# Altium PCB nfc-epd.PcbDoc
Units mil, origin at the board's own origin, x right, y up, seen from the top; angles counter-clockwise.
Board outline 4000 x 2000 mil, 4 copper layers (Top Layer, GND Plane, Signal 1, Bottom Layer); 111 components, 92 nets, 355 pads, 73 vias.
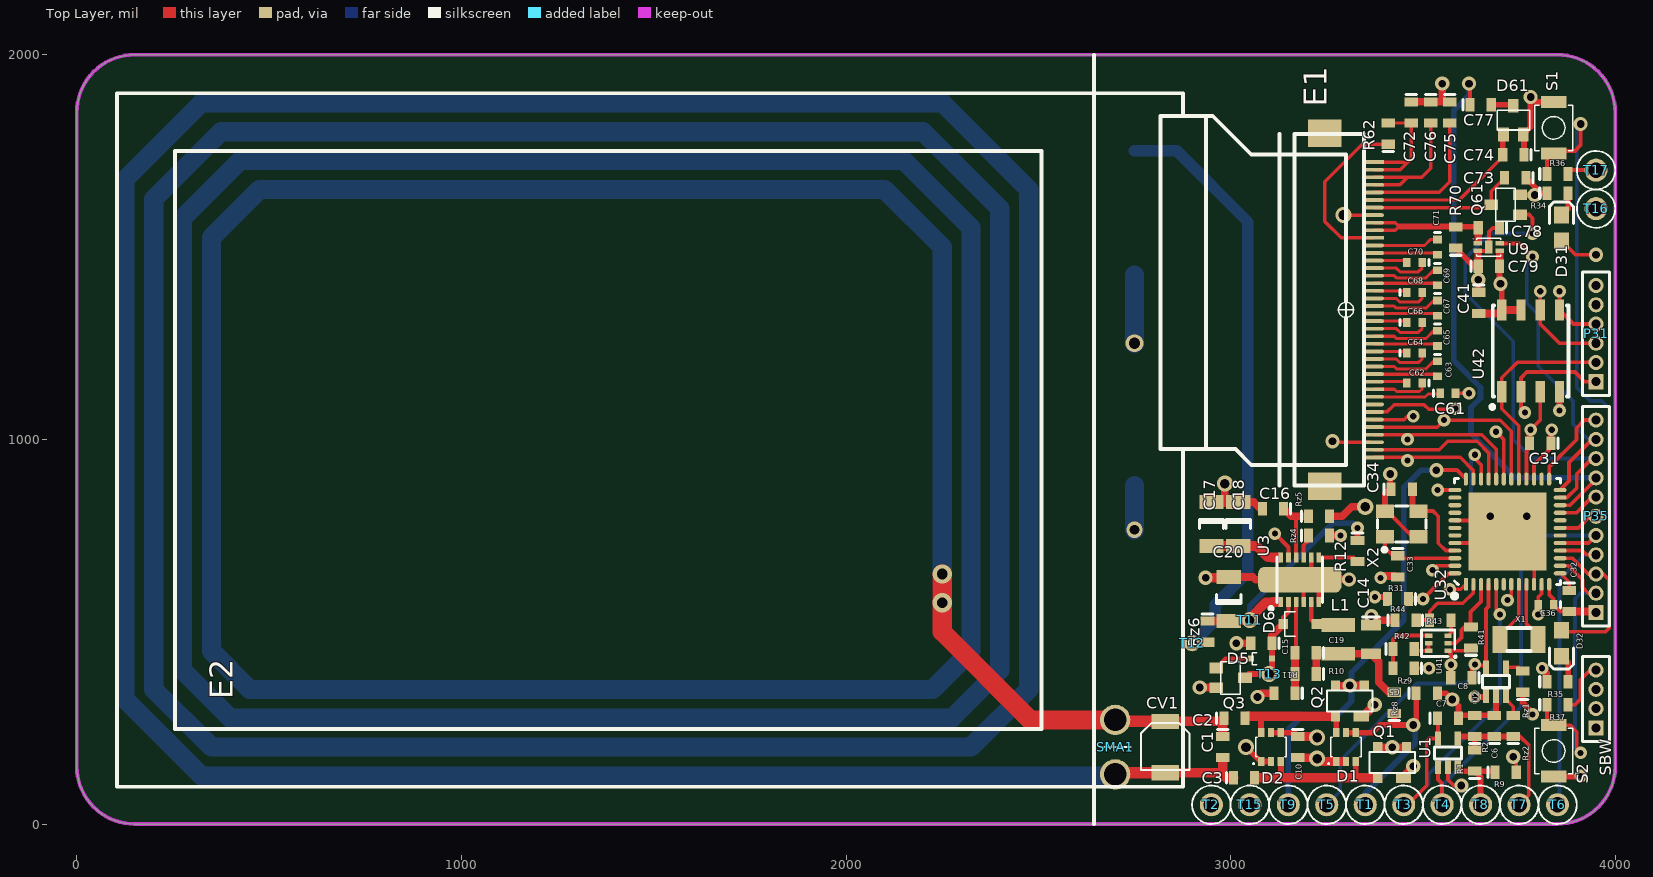
[diagram p0: Top Layer view]
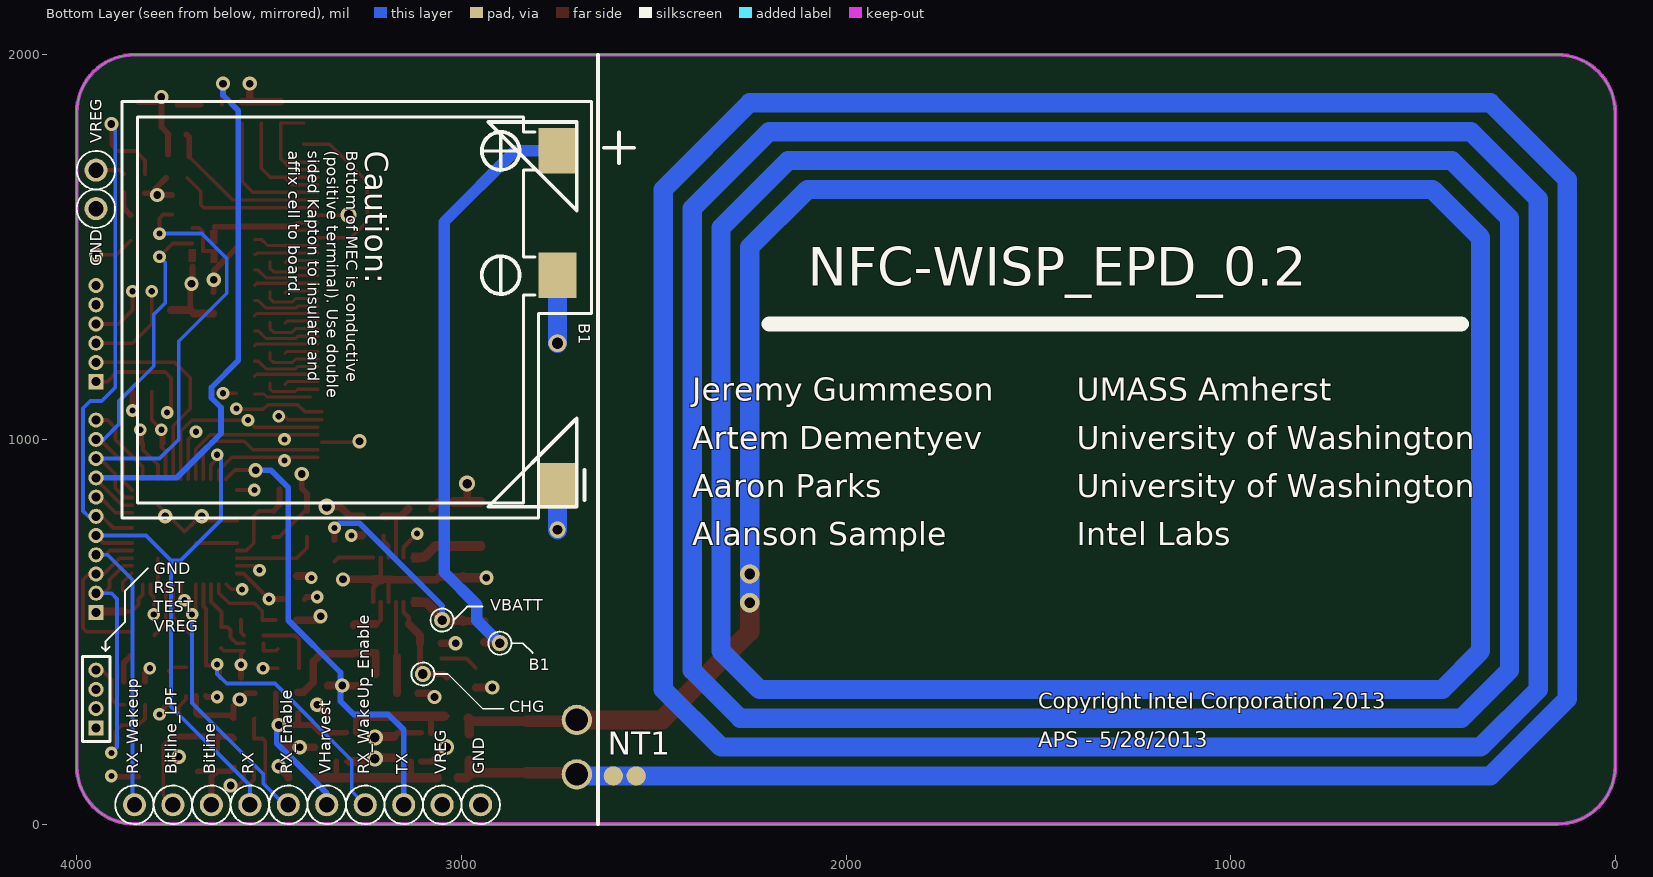
[diagram p1: Bottom Layer view, seen from below]
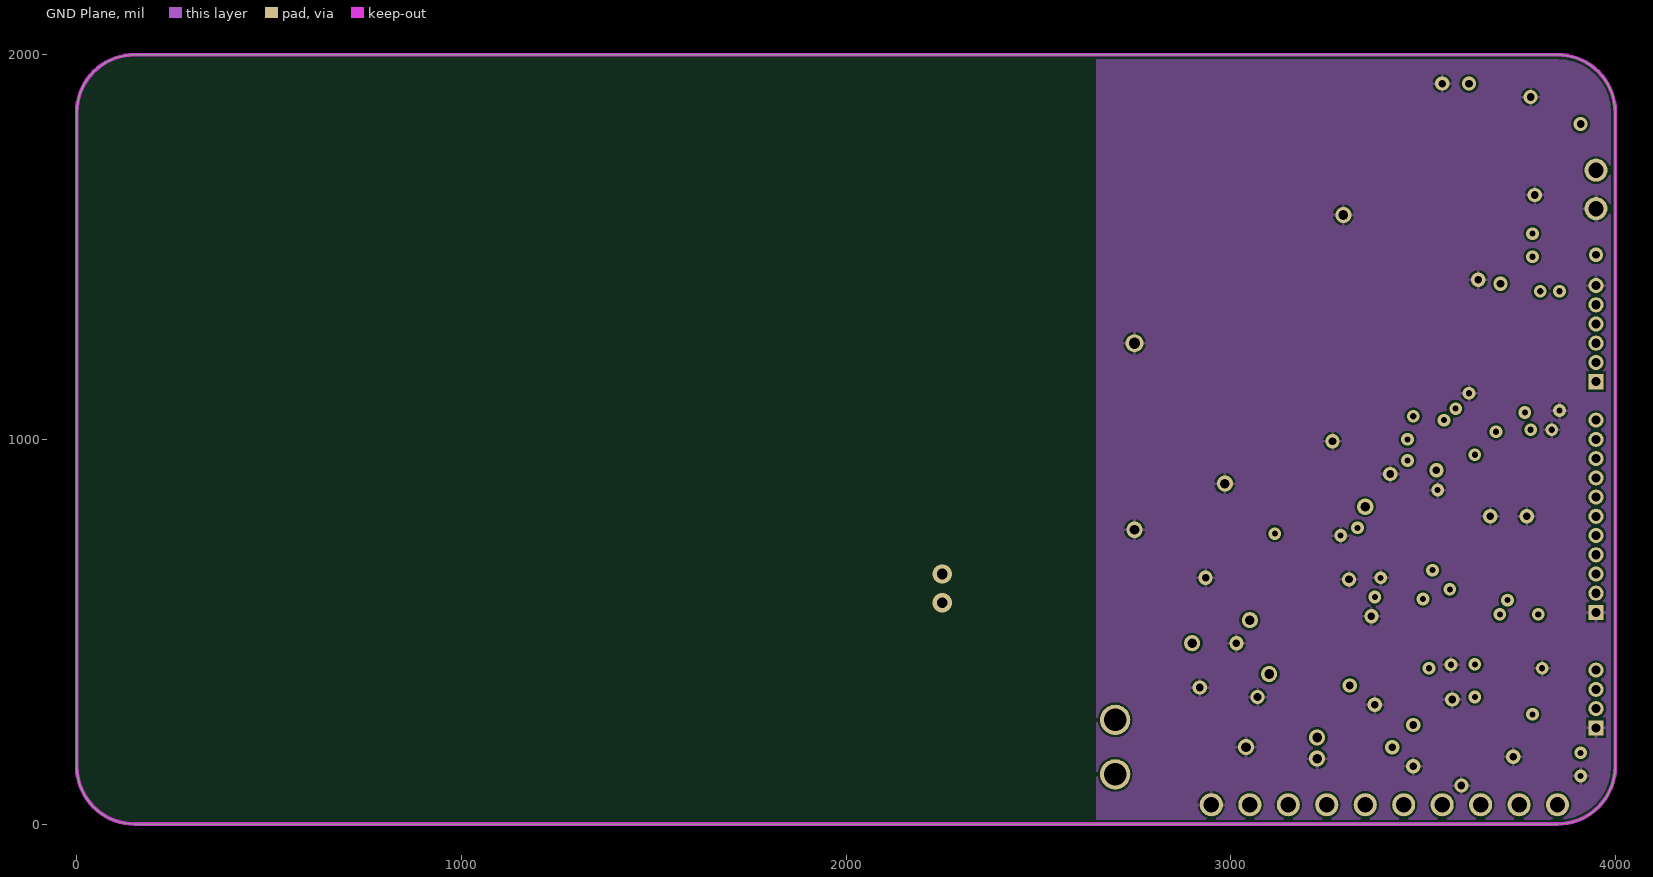
[diagram p2: GND Plane]
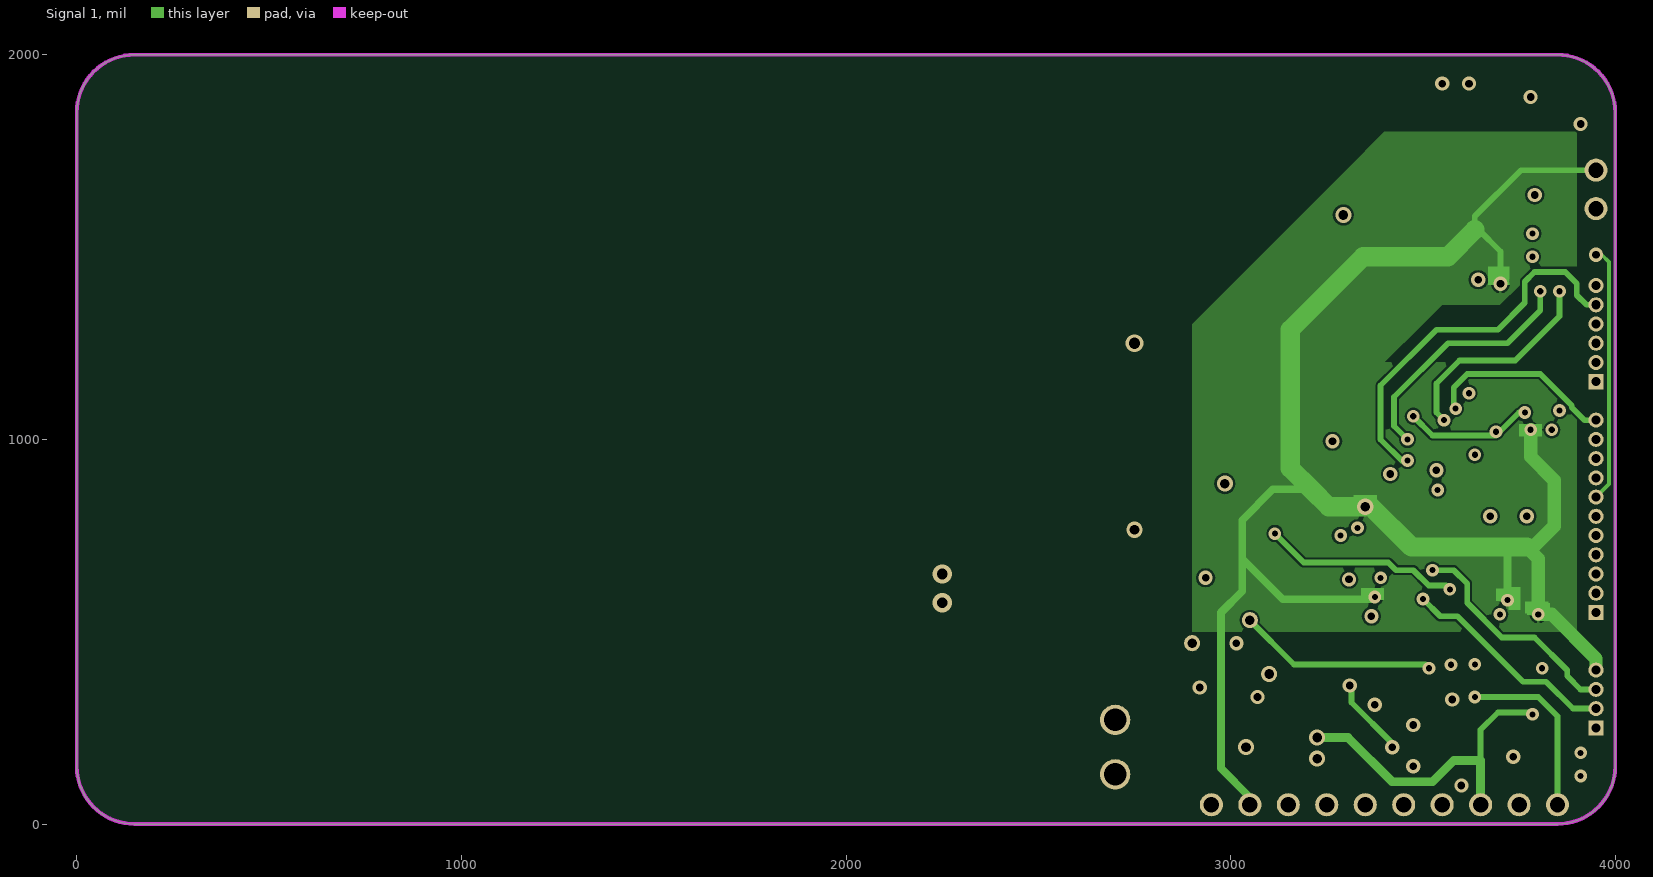
[diagram p3: Signal 1]

## Layer stack, top to bottom
Top Layer: signal copper 1.4
Dielectric: core 12.6, FR-4, Dk 4.8
GND Plane: signal copper 1.4
Dielectric: prepreg 12.6, FR-4, Dk 4.8
Signal 1: signal copper 1.4
Dielectric: core 12.6, FR-4, Dk 4.8
Bottom Layer: signal copper 1.4

## Board outline
0,150 0,1850 cw(c150,1850) 150,2000 3850,2000 cw(c3850,1850) 4000,1850 4000,150 cw(c3850,150) 3850,0 150,0 cw(c150,150)

## Design rules (kind name [scope] priority, off if disabled: settings)
Clearance "Clearance~Sunstone Circuits" [All] p1: gap=6 // Sunstone Circuits Minimum Clearance Rule (MLB~4&6 Layer Designs)
HoleSize "HoleSize~Sunstone Circuits" [All] p1: absolutevalues=TRUE maxlimit=251 minlimit=8 maxpercent=80.000 minpercent=20.000 // Sunstone Circuits Hole Size Rule (MLB~4&6 Layer Designs)
HoleSize Testpoint [All] p2: absolutevalues=TRUE maxlimit=100 minlimit=1 maxpercent=80.000 minpercent=20.000
HoleSize TestPointUsage [All] p3: absolutevalues=TRUE maxlimit=100 minlimit=1 maxpercent=80.000 minpercent=20.000
MinimumAnnularRing "MinimumAnnularRing~Sunstone Circuits" [All] p1: minimumring=7 // Sunstone Circuits Minimum Annular Ring (MLB~4&6 Layer Designs)
MinimumSolderMaskSliver [All] p1 off: minsoldermaskwidth=10
PlaneClearance "PlaneClearance~Sunstone Circuits" [All] p1: clearance=12 // Sunstone Circuits Power Plane Clearance Rule (MLB~4&6 Layer Designs)
PlaneConnect "PlaneConnect~Sunstone Circuits" [All] p1: planeconnectstyle=Relief reliefexpansion=10 reliefentries=4 reliefconductorwidth=8 reliefairgap=10 // Sunstone Circuits Power Plane Connect Rule (MLB~4&6 Layer Designs)
PolygonConnect "PolygonConnect~Sunstone Circuits" [All] p1: connectstyle=Relief reliefconductorwidth=8 reliefentries=4 polygonreliefangle="90 Angle" airgapwidth=10 // Sunstone Circuits Polygon Connect Style (MLB~4&6 Layer Designs)
RoutingVias "RoutingVias~Sunstone Circuits" [All] p1: holewidth=16 width=30 viastyle="Through Hole" minholewidth=8 minwidth=24 maxholewidth=20 maxwidth=40 // Sunstone Circuits Routing Vias Rule (MLB~4&6 Layer Designs)
ShortCircuit "ShortCircuit~Sunstone Circuits" [All] p1: allowed=FALSE // Sunstone Circuits Short Circuit Rule~Do Not Allow (MLB~4&6 Layer Designs)
SilkToSilkClearance [All] p1 off: silktosilkclearance=10
SilkToSolderMaskClearance SilkscreenOverComponentPads [IsPad] p1 off: minsilkscreentomaskgap=10 clearancetoexposedcopper=TRUE
SolderMaskExpansion "SolderMaskExpansion~Sunstone Circuits" [All] p1: expansion=3 // Sunstone Circuits Solder Mask Expansion Rule (MLB~4&6 Layer Designs)
ViasUnderSMD "ViasUnderSMD~Sunstone Circuits" [All] p1: allowed=FALSE // Sunstone Circuits Vias Under SMD~Do Not Allow (MLB~4&6 Layer Designs)
Width "Width~Sunstone Circuits" [All] p1: maxlimit=100 minlimit=6 preferedwidth=10 // Sunstone Circuits Minimum Width Rule (MLB~4&6 Layer Designs)
21 further rules are at their usual default settings.

## Classes and differential pairs
component class Sensors: C41 R41 R42 R43 R44 U41 U42
component class Digital: C31 C32 C33 C34 C35 C36 D31 D32 P31 P35 R31 R34 R35 R36 R37 S1 S2 SBW U32 X1 X2
component class "E-ink Diplay": C61 C62 C63 C64 C65 C66 C67 C68 C69 C70 C71 C72 C73 C74 C75 C76 C77 C78 C79 D61 E1 E2 E3 Q61 R61 R62 R70 U9
component class Power: B1 B2 C14 C15 C16 C17 C18 C19 C20 D5 D6 L1 Q3 R10 R11 R12 Rz4 Rz5 Rz6 Rz8 Rz9 T11 T12 T13 T14 T15 T16 T17 U3
component class AFE: C1 C2 C3 C4 C5 C6 C7 C8 C10 C11 C12 C13 CV1 CV2 D1 D2 NT1 Q1 Q2 R1 R2 R9 Rz1 Rz2 SMA1 T1 T2 T3 T4 T5 T6 T7 T8 T9 TP8 U1 U2

## Components (designator, comment, footprint, x,y, rotation, side; value= is the part's Value field where it differs from the comment)
B1 "MEC201" "Battery - MEC201 - Caution" 2750,1750 r270 bottom locked
C1 "Cap" 0603 2980,200 r270 top
C2 "Cap" 0603 3010,275 r0 top
C3 "Cap" 0603 3035,120 r0 top
C5 "Cap" 0603 3510,340 r0 top
C6 "Cap" 0603 3685,255 r90 top
C7 "Cap" 0603 3565,275 r0 top
C8 "Cap" 0603 3600,380 r180 top
C10 "Cap" 0603 3175,200 r270 top
C14 "Cap" 0805 3365,480 r270 top
C15 "Cap" 0603 3080,470 r180 top
C16 "Cap" 0603 3110,820 r180 top
C17 "Cap" 1206 2950,780 r270 top
C18 "Cap" 1206 3020,780 r270 top
C19 "Cap" 0603 3195,445 r180 top
C20 "Cap" 1206 2995,585 r90 top
C31 "Cap" 0603 3805,990 r180 top
C32 "Cap" 0603 3880,580 r270 top
C33 "Cap" 0603 3435,670 r270 top
C34 "Cap" 0603 3445,870 r0 top
C36 "Cap" 0402 3820,570 r180 top
C41 "Cap" 0603 3645,1355 r270 top
C61 "Cap" 0402 3565,1120 r0 top
C62 "Cap" 0402 3478.19,1146.42 r180 top
C63 "Cap" 0402 3538.19,1183.42 r270 top
C64 "Cap" 0402 3478.19,1224.42 r0 top
C65 "Cap" 0402 3538.19,1262.42 r270 top
C66 "Cap" 0402 3478.19,1303.42 r0 top
C67 "Cap" 0402 3538.19,1341.42 r270 top
C68 "Cap" 0402 3478.19,1381.42 r0 top
C69 "Cap" 0402 3538.19,1420.42 r270 top
C70 "Cap" 0402 3478.19,1460.42 r180 top
C71 "Cap" 0402 3538,1500 r270 top
C72 "Cap" 0603 3470,1850 r270 top
C73 "Cap" 0603 3740,1680 r180 top
C74 "Cap" 0603 3735,1740 r180 top
C75 "Cap" 0603 3570,1850 r270 top
C76 "Cap" 0603 3520,1850 r270 top
C77 "Cap" 0603 3650,1870 r0 top
C78 "Cap" 0603 3671.46,1549.84 r180 top
C79 "Cap" 0603 3671.46,1449.84 r0 top
CV1 "GKY40056" "Var-Cap - GKY40056" 2830,200 r90 top
D1 "BAS70BRW" SOT-363 3300,200 r90 top
D2 "BAS70BRW" SOT-363 3105,200 r90 top
D5 "ESD5Z3.3T1" SOD-523 3080,430 r90 top
D6 "ZLLS410TA" SOD-323 3180,520 r90 top
D31 "LED" "DIODE - 0603" 3860,1550 r270 top
D32 "LED" "DIODE - 0603" 3860,470 r90 top
D61 "BAT54SW" "SOT-323 / SC-70" 3735,1830 r0 top
E1 "EPD - Connector" "EPD - Connector" 3300,1337 r180 top
E2 "EPD - 2.7\"" "EPD - EM027AS012" 3300,1337 r180 top
L1 "Ind - Power" "INDUCTOR - 1008" 3280,480 r90 top
NT1 "PCB Coil" "Net Tie - 50mil" 2575,125 r0 bottom net-tie
P31 "MHDR1X6" MHDR1X6 3950,1150 r90 top
P35 "MHDR1X11" MHDR1X11 3950,550 r90 top
Q1 "BF1105R" SOT-143R 3420,160 r0 top
Q2 "BF1105R" SOT-143R 3310,320 r0 top
Q3 "BJT - Generic" "SOT-323 / SC-70" 3000,380 r270 top
Q61 "2N7002KW" "SOT-323 / SC-70" 3715,1610 r90 top
R1 "Res" 0603 3635,165 r90 top
R2 "Res" 0603 3635,255 r90 top
R9 "Res" 0603 3715,135 r0 top
R10 "Res" 0603 3195,390 r180 top
R11 "Res" 0603 3140,340 r180 top
R12 "Res" 0603 3330,710 r270 top
R31 "Res" 0603 3435,585 r180 top
R34 "Res" 0603 3850,1640 r0 top
R35 "Res" 0603 3850,370 r0 top
R36 "Res" 0603 3850,1690 r0 top
R37 "Res" 0603 3850,310 r0 top
R41 "Res" 0603 3625,485 r90 top
R42 "Res" 0603 3450,455 r0 top
R43 "Res" 0603 3545,530 r0 top
R44 "Res" 0603 3455,530 r0 top
R62 "Res" 0603 3410,1795 r90 top
R70 "Res" 0603 3585,1525 r90 top
Rz1 "Res" 0603 3760,370 r90 top
Rz2 "Res" 0603 3735,255 r90 top
Rz4 "Res" 0603 3230,750 r0 top
Rz5 "Res" 0603 3230,800 r0 top
Rz6 "Res" 0603 2940,500 r270 top
Rz8 "Res" 0603 3425,315 r90 top
Rz9 "Res" 0603 3450,405 r180 top
S1 "B3U-1000P" "SWITCH - B3U-1000P" 3840,1810 r90 top
S2 "B3U-1000P" "SWITCH - B3U-1000P" 3840,190 r270 top
SBW "MHDR1X4" MHDR1X4 3950,250 r90 top
SMA1 "SMA - Hole - 2 Pin" "SMA - Hole - 2 Pin" 2700,200 r0 top
T1 "Test Point" "Test Point - Small" 3350,50 r0 top
T2 "Test Point" "Test Point - Small" 2950,50 r0 top
T3 "Test Point" "Test Point - Small" 3450,50 r0 top
T4 "Test Point" "Test Point - Small" 3550,50 r0 top
T5 "Test Point" "Test Point - Small" 3250,50 r0 top
T6 "Test Point" "Test Point - Small" 3850,50 r0 top
T7 "Test Point" "Test Point - Small" 3750,50 r0 top
T8 "Test Point" "Test Point - Small" 3650,50 r0 top
T9 "Test Point" "Test Point - Small" 3150,50 r0 top
T11 "Test Point" "Test Point - Super Small" 3050,530 r0 top
T12 "Test Point" "Test Point - Super Small" 2900,470 r90 top
T13 "Test Point" "Test Point - Super Small" 3100,390 r90 top
T15 "Test Point" "Test Point - Small" 3050,50 r0 top
T16 "Test Point" "Test Point - Small" 3950,1600 r90 top
T17 "Test Point" "Test Point - Small" 3950,1700 r0 top
U1 "NCS2200" SC70-5 3565,185 r0 top
U2 "MAX9119" SC70-5 3690,370 r0 top
U3 "MAX17710" "MAX17710 - WINGS" 3180,635 r90 top
U9 "SiP32431" TDFN-4 3671.46,1499.84 r270 top
U32 "MSP430F5310" 48-QFN 3720,760 r90 top locked
U41 "SI1016X" "SC-89-6 Vishay" 3540,470 r180 top
U42 "FM25V20" TDFN-8 3780,1230 r0 top
X1 "XTAL" "XTAL - 2PIN [3.2MM X 1.5MM]" 3750,480 r0 top
X2 "XTAL 4pin" "XTAL - 4PIN [3.2MM X 2.5MM]" 3445,780 r0 top

## Footprints (in the part's own frame and the unit in brackets; to place one, negate y for a bottom-side part, rotate by r counter-clockwise, add the part's x,y. Pads: shape width x height; smd on the part's side, far side on the other; paste and mask are expansions set on the pad)
48-QFN [mm]
  rect 5.15x5.15 smd mask+0.07: 0(0,0)
  rect 0.85x0.28 smd mask+0.07: 1(-3.475,2.75)
  oval 0.85x0.28 smd mask+0.07: 2(-3.475,2.25) 3(-3.475,1.75) 4(-3.475,1.25) 5(-3.475,0.75) 6(-3.475,0.25) 7(-3.475,-0.25) 8(-3.475,-0.75) 9(-3.475,-1.25) 10(-3.475,-1.75) 11(-3.475,-2.25) 12(-3.475,-2.75) 25(3.475,-2.75) 26(3.475,-2.25) 27(3.475,-1.75) 28(3.475,-1.25) 29(3.475,-0.75) 30(3.475,-0.25) 31(3.475,0.25) 32(3.475,0.75) 33(3.475,1.25) 34(3.475,1.75) 35(3.475,2.25) 36(3.475,2.75)
  oval 0.28x0.85 smd mask+0.07: 13(-2.75,-3.475) 14(-2.25,-3.475) 15(-1.75,-3.475) 16(-1.25,-3.475) 17(-0.75,-3.475) 18(-0.25,-3.475) 19(0.25,-3.475) 20(0.75,-3.475) 21(1.25,-3.475) 22(1.75,-3.475) 23(2.25,-3.475) 24(2.75,-3.475) 37(2.75,3.475) 38(2.25,3.475) 39(1.75,3.475) 40(1.25,3.475) 41(0.75,3.475) 42(0.25,3.475) 43(-0.25,3.475) 44(-0.75,3.475) 45(-1.25,3.475) 46(-1.75,3.475) 47(-2.25,3.475) 48(-2.75,3.475)
  silkscreen extent -4.4,-3.5 3.5,3.65, body extent -3.5,-3.5 3.5,3.5, height 1
0402 [mm] "Surface Mount; Body 1 x 0.5 mm (LxW typ)"
  rect 0.5x0.6 smd: 1(-0.5,0) 2(0.5,0)
  silkscreen extent -0.95,-0.2 -0.95,0.2, body extent -0.5,-0.25 0.5,0.25, height 0.5
0603 [mm] "Surface Mount; Body 1.6 x 0.8 mm (LxW typ)"
  rect 0.6x0.9 smd: 1(-0.7,0) 2(0.7,0)
  silkscreen extent -1.17,-0.35 -1.17,0.35, body extent -0.8,-0.4 0.8,0.4, height 0.8
0805 [mm] "Surface Mount; Body 2.0 x 1.25 mm (LxW typ)"
  rect 0.7x1.3 smd: 1(-0.95,0) 2(0.95,0)
  silkscreen extent -1.48,-0.55 -1.48,0.55, body extent -1,-0.63 1,0.63, height 1.25
1206 [mm] "Surface Mount; Body 3.2 x 1.6 mm (LxW typ)"
  rect 0.9x1.6 smd: 1(-1.45,0) 2(1.45,0)
  silkscreen extent -0.3,-0.8 0.3,0.8, body extent -1.6,-0.8 1.6,0.8, height 1.1
"Battery - MEC201 - Caution" [mm] "Thin-Film Battery - 25.4 x 25.4 x 0.170mm"
  rect 3x2.5 smd: 1(0,0) 2(8.2,0)
  silkscreen extent -3.25,-28.75 24.25,2.25
"DIODE - 0603" [mm] "Diode: Body 1.6 x 0.8 mm (LxW typ)"
  rect 1.1x1 smd: 1(0.85,0) 2(-0.85,0)
  silkscreen extent -1.7,-0.8 -0.3,0.8, body extent -0.8,-0.4 0.8,0.4, height 0.8
"EPD - Connector" [mm] "CONN FPC/FFC 40POS .5MM HORZ SMD, ZIF"
  rect 2.2x1.8 smd: 0(1.4,11.65) 0(1.4,-11.65)
  rect 1.3x0.25 smd: 1(-1.85,9.75) 10(-1.85,5.25) 20(-1.85,0.25) 30(-1.85,-4.75) 40(-1.85,-9.75)
  oval 1.3x0.25 smd: 2(-1.85,9.25) 3(-1.85,8.75) 4(-1.85,8.25) 5(-1.85,7.75) 6(-1.85,7.25) 7(-1.85,6.75) 8(-1.85,6.25) 9(-1.85,5.75) 11(-1.85,4.75) 12(-1.85,4.25) 13(-1.85,3.75) 14(-1.85,3.25) 15(-1.85,2.75) 16(-1.85,2.25) 17(-1.85,1.75) 18(-1.85,1.25) 19(-1.85,0.75) 21(-1.85,-0.25) 22(-1.85,-0.75) 23(-1.85,-1.25) 24(-1.85,-1.75) 25(-1.85,-2.25) 26(-1.85,-2.75) 27(-1.85,-3.25) 28(-1.85,-3.75) 29(-1.85,-4.25) 31(-1.85,-5.25) 32(-1.85,-5.75) 33(-1.85,-6.25) 34(-1.85,-6.75) 35(-1.85,-7.25) 36(-1.85,-7.75) 37(-1.85,-8.25) 38(-1.85,-8.75) 39(-1.85,-9.25)
  silkscreen extent -1.2,-11.6 4.4,11.6, body extent -1.2,-11.6 4.4,11.6, height 2
"EPD - EM027AS012" [mil] "2.7'' TFT EPD Panel, with mating for STARCONN 089H40 Conncetor"
  silkscreen extent -20,-563 3196,1240, body extent 423,-563 3196,1240, height 43
"INDUCTOR - 1008" [mm] "Murata - LQM2HPN1R5MG0L"
  rect 0.9x2.2 smd: 1(-0.95,0) 2(0.95,0)
  body extent -1.25,-1 1.25,1, height 1.1
"MAX17710 - WINGS" [mm] "12-UFDFN Exposed Pad -  with \"Wings\" for easy to desoldering"
  rrect50% 1.7x5.5 smd: 0(0,0)
  rect 0.66x0.3 smd: 1(-1.475,1.25) 2(-1.475,0.75) 3(-1.475,0.25) 4(-1.475,-0.25) 5(-1.475,-0.75) 6(-1.475,-1.25) 7(1.475,-1.25) 8(1.475,-0.75) 9(1.475,-0.25) 10(1.475,0.25) 11(1.475,0.75) 12(1.475,1.25)
  silkscreen extent -2,-1.5 1.5,2, body extent -1.5,-1.5 1.5,1.5, height 0.5
MHDR1X4 [mm] "Connector; Header; 4 Position"
  rect 1x1 hole 0.6: 1(0,0)
  round 1 hole 0.6: 2(1.27,0) 3(2.54,0) 4(3.81,0)
  silkscreen extent -0.9,-0.9 4.71,0.9
MHDR1X6 [mm] "Connector; Header; 6 Position"
  rect 1x1 hole 0.6: 1(0,0)
  round 1 hole 0.6: 2(1.27,0) 3(2.54,0) 4(3.81,0) 5(5.08,0) 6(6.35,0)
  silkscreen extent -0.9,-0.9 7.25,0.9
MHDR1X11 [mm] "Connector; Header; 11 Position"
  rect 1x1 hole 0.6: 1(0,0)
  round 1 hole 0.6: 2(1.27,0) 3(2.54,0) 4(3.81,0) 5(5.08,0) 6(6.35,0) 7(7.62,0) 8(8.89,0) 9(10.16,0) 10(11.43,0) 11(12.7,0)
  silkscreen extent -0.9,-0.9 13.6,0.9
"Net Tie - 50mil" [mil] "Net Tie is used to connect two differnt nets together"
  round 50 smd: 1(-29.53,0) 2(30,0)
  Top Layer lines w50: -30,0 30,0
SC70-5 [mm] "SC70-5"
  rect 0.4x0.92 smd: 1(-0.65,-0.95) 2(0,-0.95) 3(0.65,-0.95) 4(0.65,0.95) 5(-0.65,0.95)
  silkscreen extent -0.9,-0.4 0.9,0.4, body extent -0.9,-0.4 0.9,0.4, height 1.1
"SC-89-6 Vishay" [mm]
  rect 0.478x0.3 smd: 1(-0.638,0.5) 2(-0.638,0) 3(-0.638,-0.5) 4(0.638,-0.5) 5(0.638,0) 6(0.638,0.5)
  silkscreen extent -1.15,-0.87 1.11,0.91
"SMA - Hole - 2 Pin" [mm] "SMA port for wisp"
  round 2 hole 1.5: 1(0,1.796) 2(0,-1.796)
  silkscreen extent -1.02,0 1.02,0
SOD-323 [mm] "SOD-322 Footprint"
  rect 0.65x0.65 smd: 1(0,-1.1) 2(0,1.1)
  silkscreen extent -0.8,0.3 0.8,1, body extent -0.7,-0.9 0.7,0.9, height 1
SOD-523 [mm] "SOD-523 Footprint"
  rect 0.4x0.4 smd: 1(0,-0.7) 2(0,0.7)
  silkscreen extent -0.4,0.3 0.4,0.6, body extent -0.4,-0.6 0.4,0.6, height 1
SOT-143R [mm] "SOT-143R for BF1105R"
  rect 1x0.7 smd: 1(0.75,-1)
  rect 0.6x0.7 smd: 2(-0.95,-1) 3(-0.95,1) 4(0.95,1)
  silkscreen extent -1.5,-0.7 1.5,0.7, body extent -1.5,-0.7 1.5,0.7, height 1.1
"SOT-323 / SC-70" [mm] "SOT-323 / SC-70; 3 Lead Package"
  rect 0.7x0.9 smd: 1(-0.65,-0.95) 2(0.65,-0.95) 3(0,0.95)
  silkscreen extent -1.07,-0.65 1.07,0.65, body extent -1.07,-0.65 1.07,0.65, height 1
SOT-363 [mm] "SOT-363 ,SC-88 ,6 Lead"
  rect 0.6x0.42 smd: 1(-0.95,0.65) 2(-0.95,0) 3(-0.95,-0.65) 4(0.95,-0.65) 5(0.95,0) 6(0.95,0.65)
  silkscreen extent -1.15,-1 0.65,1.2, body extent -0.65,-1 0.65,1, height 1
"SWITCH - B3U-1000P" [mm] "Top Push Button Switch, OMRON, SPST-NO, Off-Mom, 0.05A 12V"
  rect 0.8x1.7 smd: 1(-1.7,0) 2(1.7,0)
  silkscreen extent -1.5,-1.25 1.5,1.25, body extent -1.5,-1.25 1.5,1.25, height 1.6
TDFN-4 [mm] "TDFN4 1.2 x 1.6"
  rect 0.3x0.55 smd: 1(-0.25,-0.725) 2(0.25,-0.725) 3(0.25,0.725) 4(-0.25,0.725)
  rect 0.86x0.5 smd: 5(0,0)
  silkscreen extent -0.6,-0.8 0.6,0.8, body extent -0.6,-0.8 0.6,0.8, height 0.55
TDFN-8 [mm] "FM25V20 - 2Mb SPI F-RAM"
  rect 0.6x1.4 smd: 1(-1.905,-2.7) 2(-0.635,-2.7) 3(0.635,-2.7) 4(1.905,-2.7) 5(1.905,2.7) 6(0.635,2.7) 7(-0.635,2.7) 8(-1.905,2.7)
  silkscreen extent -2.65,-3.83 2.5,3, body extent -2.5,-3 2.5,3, height 0.75
"Test Point - Small" [mil] "Test Point, 40mil hole, example DK: 5000K-ND"
  round 60 hole 40: 0(0,0)
  silkscreen extent -50,-50 50,50
"Test Point - Super Small" [mil] "25 - 42"
  round 42 hole 25: 0(0,0)
"Var-Cap - GKY40056" [mm] "CAP TRIMMER 8-40PF 50V SMD - GKY40056 - Sprague-Goodman"
  rect 1x1.8 smd: 1(1.695,0) 2(-1.695,0)
  silkscreen extent -1.5,-1.6 1.6,1.6, body extent -1.5,-1.6 1.6,1.6, height 1.4
"XTAL - 2PIN [3.2MM X 1.5MM]" [mm] "FC-135   crystal - epson eletronics"
  rect 1x1.8 smd: 1(-1.25,0) 2(1.25,0)
  silkscreen extent -0.76,-0.76 0.76,0.76, body extent -1.6,-0.75 1.6,0.75, height 0.8
"XTAL - 4PIN [3.2MM X 2.5MM]" [mm] "CRYSTAL, 3.2mm x 2.5mm,  4Pin"
  rect 1.2x0.9 smd: 1(-1.1,-0.85) 2(1.1,-0.85) 3(1.1,0.85) 4(-1.1,0.85)
  silkscreen extent -1.6,-1.83 1.6,1.2, body extent -1.6,-1.2 1.6,1.2, height 1

## Part data
B1: library part "Battery - MEC201", "ThinFilm solid state battery  - 4.1V 1.0MAH"
C1 C2 C3 C5 C6 C7 C8 C10 C14 C15 C16 C17 C18 C19 C20 C31 C32 C33 C34 C36 C41 C61 C62 C63 C64 C65 C66 C67 C68 C69 C70 C71 C72 C73 C74 C75 C76 C77 C78 C79: "Ceramic Capacitor (Surface Mount)"
CV1: library part Var-Cap/603, "Var-Cap Sprague-Goodman GKY40056"
D1 D2: library part "Diode - Array_2", "Diode Array - 2 Pair Series Connection"
D5: "5V Overvoltage Protection Zener"
D6: library part Diode, "General Purpose Diode"
D31 D32: library part "Diode - LED", "Typical RED, GREEN, YELLOW, AMBER GaAs LED"
D61: library part "Diode - Array_1", "Diode Array, Two in Series, Small Package SOT-323"
E1: "FPC, 40pin, 0.5mm Pitch - ZIF"
E2: library part "EPD - Display EM027AS012", "2.7\" TFT EPD Panel, STARCONN 089H40 variant"
L1: "Power Inductor"
NT1: library part "Net Tie - Coil", "Hand draw coil symbol based on a 'Net Tie'"
P31: "Header, 6-Pin"
P35: "Header, 11-Pin"
Q1 Q2: "SOT-143R, N-Channel Dual-Gate Mos-Fets MOSFET"
Q3: "Generic BJT"
Q61: library part MOSFET-N, "N-Channel MOSFET"
R1 R2 R9 R10 R11 R12 R31 R34 R35 R36 R37 R41 R42 R43 R44 R62 R70 Rz1 Rz2 Rz4 Rz5 Rz6 Rz8 Rz9: "Chip Resistor (Surface Mount)"
S1 S2: library part "Switch - Generic SPST", "Generic Single-Pole, Single-Throw Switch"
SBW: "Header, 4-Pin"
SMA1: "Two pin SMA connector wisp"
T1 T2 T3 T4 T5 T6 T7 T8 T9 T11 T12 T13 T15 T16 T17: "Test Point, large or small foot prints"
U1: "Comparator: On Semi 10uA Comparator"
U2: "IC COMPARATOR BTR SC70-5, 350nA"
U3: "IC ENERGY HARVEST MNGR 12UTDFN"
U9: "High Sside Switch - 4TDFN package"
U32: library part "MSP430F5310 - 48Pin", "MSP430 - 48LQFP or 48QFN"
U41: "NMOS and PMOS array"
U42: "2 Mbit FRAM SPI"
X1: library part "XTAL 2-pins", "Crystal Oscillator - [3.20mm x 1.50mm]"
X2: library part "XTAL 4-pins", "Crystal - 4-Pin Surface Mount"

## Free pads (board coordinates)
  rect 98.43x118.11 smd far side: 2(2750,880)

## Via types
v1: diameter 33, hole 16, Top Layer to Bottom Layer, tented both sides, 36 vias
v2: diameter 37, hole 20, Top Layer to Bottom Layer, tented both sides, 27 vias
v3: diameter 42, hole 25, Top Layer to Bottom Layer, tented both sides, 7 vias
v4: diameter 50, hole 28, Top Layer to Bottom Layer, 2 vias
v5: diameter 46, hole 29, Top Layer to Bottom Layer, tented both sides, 1 vias

## Nets (pads, with @x,y where several pads share a name; then routed paths per layer and width w, separated by ;. In a path a pad name is that pad's centre, name@x,y a point inside that pad or via, vN(x,y) a via of type N, cw(c..) or ccw(c..) an arc to the next point about the centre after c; other vN are vias at no path point)
AE: R12.2 U3.7 | length 105.2
  Top Layer w10: U3.7 3319.37,693.07 R12.2
ANT_NEG: C1.2 C3.1 CV1.2 NT1.2 SMA1.2 | length 440.7
  Top Layer w25: CV1.2 2974.17,133.27 ; C1.2@2980,165 2980,127.44 2987.44,120 C3.1
  Top Layer w30: SMA1.2 2703.98,133.27 CV1.2
  Bottom Layer w50: NT1.2 2695.71,125 SMA1.2
ANT_POS: C1.1 C2.1 CV1.1 NT1.1 SMA1.1 | length 28718.9
  Top Layer w8: SMA1.1@2678.82,249.53 SMA1.1
  Top Layer w25: CV1.1 2974.17,266.73 C2.1@2980,272.56 ; C1.1@2980,235 C2.1@2980,272.56 ; C2.1 C2.1@2980,272.56
  Top Layer w30: SMA1.1 2703.98,266.73 CV1.1
  Top Layer w50: v4(2250,650) 2250,500 2479.29,270.71 SMA1.1
  Bottom Layer w50: v4(2250,575) 2250,1500 2100,1650 475,1650 350,1525 350,450 450,350 2225,350 2325,450 2325,1550 2150,1725 425,1725 275,1575 275,400 400,275 2275,275 2400,400 2400,1600 2200,1800 375,1800 200,1625 200,350 350,200 2325,200 2475,350 2475,1650 2250,1875 325,1875 125,1675 125,325 325,125 NT1.1
B1: B1.1 Rz6.2 T12.0 | length 1665.3
  Top Layer w23: T12.0 2902.44,472.44 Rz6.2
  Bottom Layer w30: B1.1 2860,1750 2930,1680 ; 2860.99,1749.01 3045,1565 3045,655 2960,570 2960,530 T12.0
BATT_MEAS: R43.1 R44.2 U32.2 | length 213.9
  Top Layer w9: R43.1 3517.44,553.44 3538,574 3604,574 3631.42,601.42 U32.2
  Top Layer w10: R44.2 R43.1
BATT_MEAS_ENABLE: R41.2 U32.3 U41.2 | length 211.4
  Top Layer w10: U41.2 3585,470 3600,485 3600,504 3608.56,512.56 R41.2 3623.44,514.12 3623.44,551 3651.1,578.66 U32.3
BITLINE: C10.1 D2.4 D2.5 R1.1 R9.1 Rz1.1 T8.0 U1.3 | length 1234.1
  Top Layer w10: R9.1@3685,137.44 R9.1
  Top Layer w15: D2.5 D2.4 3165.16,237.4 C10.1 ; U1.3 3600.75,137.44 R1.1 ; T8.0 3650,122.44 R1.1 ; R9.1@3685,137.44 R1.1 ; Rz1.1 3760,315 3785,290 v1(3785,285)
  Top Layer w23: C10.1 v3@3222.44,227.56
  Signal 1 w15: 3650,165 3650,245 3695,290 3785,290 v1(3785,285)
  Signal 1 w23: v3(3225,225) 3305,225 3420,110 3525,110 3580,165 3650,165 T8.0
BITLINE_LPF: C6.1 R1.2 R2.1 Rz2.1 T7.0 U1.4 | length 396
  Top Layer w10: Rz2.1 3752.56,227.44 3775,205 3775,100 3775,75 T7.0
  Top Layer w15: U1.4 3595.63,227.44 R2.1 ; R1.2 R2.1 ; Rz2.1 C6.1 R2.1
BL-LPF_T: Rz2.2 U2.3 | length 58.1
  Top Layer w10: U2.3 3715.59,324.41 3735,305 Rz2.2
BL_T: Rz1.2 U2.4 | length 48.5
  Top Layer w10: U2.4 3750.16,407.4 Rz1.2
C11M: C71.2 E1.28 | length 167
  Top Layer w8: E1.28 3531.09,1484.64 3535,1480.73 C71.2@3538.19,1480.73
C11P: C71.1 E1.29 | length 171.7
  Top Layer w8: E1.29 3504.32,1504.32 3520.1,1520.1 C71.1@3538,1520.1
C12M: C70.1 E1.26 | length 150.4
  Top Layer w8: E1.26 3430.56,1445.27 3440.19,1435.64 3488.19,1435.64 3497.87,1445.32 C70.1@3497.87,1462.64
C12P: C70.2 E1.27 | length 87.9
  Top Layer w8: E1.27 3453.19,1464.95 C70.2@3458.5,1459.64
C13M: C69.2 E1.24 | length 167.9
  Top Layer w8: E1.24 3532.02,1405.9 C69.2@3538.19,1399.73
C13P: C69.1 E1.25 | length 176.1
  Top Layer w8: E1.25 3425.24,1425.58 3430.93,1419.9 3508.19,1419.9 3528.39,1440.1 C69.1
C14M: C68.2 E1.22 | length 150.4
  Top Layer w8: E1.22 3430.56,1366.53 3440.19,1356.9 3488.19,1356.9 3497.87,1366.58 C68.2@3497.87,1383.9
C14P: C68.1 E1.23 | length 87.9
  Top Layer w8: E1.23 3453.19,1386.21 C68.1@3458.5,1380.9
C15M: C67.2 E1.20 | length 168
  Top Layer w8: E1.20 3531.76,1327.16 C67.2@3538.19,1320.73
C15P: C67.1 E1.21 | length 176
  Top Layer w8: E1.21 3425.24,1346.84 3430.93,1341.16 3508.19,1341.16 3528.13,1361.1 C67.1
C16M: C66.2 E1.18 | length 150.4
  Top Layer w8: E1.18 3430.56,1287.79 3440.19,1278.16 3488.19,1278.16 3497.87,1287.84 C66.2@3497.87,1305.16
C16P: C66.1 E1.19 | length 87.9
  Top Layer w8: E1.19 3453.19,1307.47 C66.1@3458.5,1302.16
C21M: C65.2 E1.16 | length 167.7
  Top Layer w8: E1.16 3532.5,1248.42 C65.2
C21P: C65.1 E1.17 | length 175.9
  Top Layer w8: E1.17 3425.24,1268.1 3430.93,1262.42 3508.19,1262.42 3527.87,1282.1 C65.1
C31M: C64.2 E1.14 | length 150.4
  Top Layer w8: E1.14 3430.56,1209.05 3440.19,1199.42 3488.19,1199.42 3497.87,1209.1 C64.2@3497.87,1226.42
C31P: C64.1 E1.15 | length 87.9
  Top Layer w8: E1.15 3453.19,1228.73 C64.1@3458.5,1223.42
C41M: C63.1 E1.13 | length 176
  Top Layer w8: E1.13 3425.24,1189.36 3431.19,1183.42 3508.19,1183.42 3527.87,1203.1 C63.1
C41P: C63.2 E1.12 | length 147.8
  Top Layer w8: E1.12@3392.83,1169.68 3393.09,1169.42 3532.5,1169.42 C63.2
C42M: C62.2 E1.11 | length 88.4
  Top Layer w8: E1.11 3451.93,1149.99 C62.2@3458.5,1143.42
C42P: C62.1 E1.10 | length 145.6
  Top Layer w8: E1.10 3425.24,1130.31 3431.19,1124.36 3491.13,1124.36 3497.87,1131.1 C62.1
CHG: C15.1 D5.1 D6.2 Q3.3 T13.0 U3.2 | length 274.6
  Top Layer w11: D6.2 3136.69,536.69 3150.47,550.47 U3.2
  Top Layer w15: Q3.3 3047.4,390 T13.0 3107.56,397.56 D5.1 C15.1
  Top Layer w20: C15.1 3107.56,490.87 D6.2
EPD_BUSY: E1.2 U32.33 | length 387.6
  Top Layer w9: E1.2 3542.83,972.83 3565,995 3641.01,995 3671.29,964.72 ; U32.33 3670.79,964.21
EPD_DISCHARGE: P35.9 Q61.1 U32.23 | length 1192.3
  Top Layer w10: Q61.1 3775.59,1584.41 3785,1575 v1(3785,1535) ; U32.23 3874.83,848.58 3900,873.75 3900,910 3940,950 P35.9
  Bottom Layer w10: v1(3785,1535) 3675,1535 3610,1470 3610,1380 3735,1255 3735,1000 3785,950 P35.9
EPD_PANEL_ON: P35.10 U9.4 U32.24 | length 843
  Top Layer w10: U9.4 3750.31,1509.69 v1(3785,1475) ; U32.24 3880,891.46 3880,940 3940,1000 P35.10
  Bottom Layer w10: v1(3785,1475) 3770,1460 3770,1355 3800,1325 3800,1190 3890,1100 3890,1040 3930,1000 P35.10
EPD_PWM: C77.1 P35.8 U32.22 | length 1522.7
  Top Layer w10: v2(3620,1925) v2@3622.44,1922.56 ; C77.1 v2@3622.44,1922.56 ; v2@3622.44,1925 v2@3622.44,1922.56 ; U32.22 3882.67,828.9 3936.46,882.69 3937.69,882.69 3950,895 P35.8
  Bottom Layer w15: v2(3620,1925) 3620,1895.12 3580,1855.12 3580,1205 3650,1135 3650,1107.57 3625,1082.57 3625,1015 3648,992 3648.25,992 3667,973.25 3667,973 3740,900 P35.8
EPD_RESET: E1.7 P35.11 U32.25 | length 949.3
  Top Layer w9: E1.7@3362.83,1071.25 3406.25,1071.25 3425,1090 3502.83,1090 3515,1077.83 3582.83,1077.83 v1(3585,1080)
  Top Layer w10: U32.25 3828.27,928.27 3899.06,999.06 3899.06,1029.06 3920,1050 P35.11
  Signal 1 w15: v1@3580,1080 3580,1135 3615,1170 3805.25,1170 3887,1088.25 3887,1083 3920,1050 P35.11
FB: C19.2 R10.2 R11.1 U3.3 | length 236.9
  Top Layer w11: C19.2@3170.16,435 U3.3
  Top Layer w20: R11.1@3167.44,340 R10.2 C19.2@3167.44,435
FEED_NEG: C3.2 D1.3 D2.3 Q1.2 | length 406.6
  Top Layer w10: 3340,120 3340.59,120.59
  Top Layer w15: 3325,120 3325.59,120.59 D1.3
  Top Layer w16: 3130,120 3130.59,120.59 D2.3
  Top Layer w25: C3.2 3130,120 3325,120 3340,120 Q1.2@3382.6,120
FEED_POS: C2.2 D1.6 D2.6 Q2.2 | length 308.5
  Top Layer w10: C2.2@3035,280 C2.2@3037.56,280
  Top Layer w15: Q2.2 3274.41,278.82 D1.6
  Top Layer w16: D2.6 3079.41,279.41
  Top Layer w25: C2.2@3045,280 Q2.2@3265,280
GND: B1.2 C5.2 C6.2 C7.2 C8.2 C10.2 C14.1 C15.2 C16.2 C17.1 C18.1 C20.2 C31.1 C32.2 C33.2 C34.1 C36.1 C41.1 C61.2 C72.1 C73.1 C74.1 C75.1 C76.1 C78.1 C79.1 D1.1 D1.2 D2.1 D2.2 D61.2 E1.3 E1.33 P31.6 P35.1 pad.2 Q1.1 Q2.1 Q3.2 Q61.2 R2.2 R9.2 R11.2 R34.1 R35.1 R41.1 R44.1 R70.1 Rz4.2 S1.2 S2.2 SBW.1 T2.0 T16.0 U1.2 U2.2 U3.0 U3.4 U3.6 U3.8 U9.2 U9.5 U32.0 U32.10 U32.12 U32.27 U32.37 U32.41 U32.44 U41.1 U42.4 X2.2 X2.4 | length 4273.3
  Top Layer w9: v3@3293.54,1583.06 E1.33 ; C61.2 v1@3630,1120 ; U32.10 U32.0@3788.9,691.1
  Top Layer w10: v2@3265,992.51 E1.3@3362.83,992.51 ; 3290,162.6 D1.2 ; X2.4 3406.54,813.46 3473.46,746.54 X2.2 ; v1(3538.27,868.27) U32.37 ; U1.2 3565,115 3580,100 v2(3600,100) ; v1(3573,414) 3573,442.43 U41.1 3617.87,450.31 R41.1 ; U32.44 U32.0@3690.47,730.47 ; U32.41 3690.47,789.53 U32.0 U32.0@3788.9,828.9 ; U9.2 U9.5@3671.46,1490 ; C78.1 3681.46,1549.84 3671.46,1539.84 U9.5 ; v2(3735,175) 3742.56,167.44 R9.2 ; U32.27 3788.9,933.9 3827.56,972.56 C31.1@3827.56,990 ; U32.12 3828.27,596.73 3839.68,585.31 C36.1 3857.24,552.44 C32.2@3872.56,552.44 ; U9.5@3671.46,1490 U9.5 ; U9.5@3671.46,1490 U9.5
  Top Layer w11: U3.4 3189.84,625.16 U3.0 3208.43,635 3229.21,614.21 U3.6 ; U3.0@3209.53,635 U3.8
  Top Layer w15: v3(3040,200) 3077.4,162.6 D2.2 ; X2.4 3401.69,859.13 3415,872.44 v2(3415,910) ; C5.2 3560,340 3592.56,307.44 C7.2 3600.12,282.56 R2.2 C6.2 3690,287.56 U2.2 ; C8.2 3573,380.56 v1(3573,414) ; R70.1 3643.9,1438.54 v2(3643.9,1415) v2@3643.9,1407.4 ; C41.1 3643.9,1383.66 v2@3643.9,1407.4 ; v2@3646.46,1404.84 v2@3643.9,1407.4 ; Q61.2 v2(3790.59,1635.59) ; D61.2 3780,1812.01 v2(3780,1890) 3793.07,1876.93 S1.2 ; C74.1 D61.2@3762.56,1792.6 ; C73.1 3795,1652.56 v2@3795,1640 ; v2@3790,1635 v2(3790.59,1635.59) ; v1(3810,405) 3822.44,392.56 R35.1 ; R34.1 v2@3795,1640 ; C31.1 3832.56,1022.56 v1(3835,1025) ; S2.2 3908.07,123.07 v1(3910,125) ; v1(3855,1075) U42.4 ; C32.2@3872.56,552.44 C32.2 ; v2(3790.59,1635.59) v2@3795,1640
  Top Layer w20: v2(2920,355) 2962.01,355 Q3.2 ; 2985,837.09 v3(2985,885) ; C20.2 3057.91,642.09 3065,635 U3.0 3181,636 v2(3308,636) ; v2(3015,470) C15.2 ; C18.1 3060.35,837.09 C16.2@3077.44,820 ; v2(3070,330) 3080,340 R11.2 ; Rz4.2 v1(3286,750) ; v2(3366,540) 3376,530 R44.1 ; v1@3395,645 C33.2@3427.44,645 ; Q1.1 3449.53,124.53 v2(3475,150) ; C72.1 C76.1 3550,1877.56 ; v2(3550,1925) 3550,1877.56 ; C75.1 3550,1877.56 ; C32.2 3947.56,552.44 P35.1
  Top Layer w23: C10.2 3222.56,172.44 v3(3225,170) 3232.4,162.6 D1.1 3290,162.6 ; Q2.1@3350,285 v2(3375,310)
  Top Layer w25: v2(2935,640) 2992.91,640 C20.2 ; C17.1 2985,837.09 C18.1 ; U3.0@3208.43,635 U3.0@3229.21,635
  Bottom Layer w50: v3(2750,765) pad.2 ; v5(2750,1250) B1.2
  other v1: 3390,640 3620,1120
  other v2: 3576.36,323.64 3675,800 3770,800 3265,995
  other v3: 3293.19,1583.42
LCE: U3.11 U32.1 | length 638.9
  Top Layer w9: v1(3570,610) 3598.54,610 U32.1
  Top Layer w11: v1(3115,755) 3150.47,719.53 U3.11
  Signal 1 w15: v1(3115,755) 3190,680 3410,680 3430,660 3475,660 3515,620 3560,620 v1(3570,610)
LDOO: U32.42
LED1: D32.1 P35.3 U32.15 | length 404.2
  Top Layer w10: U32.15 3888.9,691.1 3930,650 P35.3 3969,650 3984,635 3984,509 3975,500 D32.1@3860,500
LED2: D31.1 P35.7 U32.21 | length 882.2
  Top Layer w10: U32.21 3899.21,809.21 3940,850 P35.7 ; D31.1 3896.54,1480 v2(3950,1480)
  Signal 1 w10: P35.7 3984,884 3984,1461 3965,1480 v2(3950,1480)
LX: D6.1 L1.2 U3.5 | length 119
  Top Layer w11: U3.5 3209.53,530.47 D6.1@3220,520
  Top Layer w20: D6.1 3277.4,520 L1.2
NetC77_2: C77.2 D61.3 | length 63.5
  Top Layer w9: D61.3@3737.4,1870 D61.3@3740,1867.4
  Top Layer w15: C77.2 D61.3@3737.4,1870
NetD5_2: D5.2 Q3.1 | length 100
  Top Layer w10: Q3.1 2987.01,430 D5.2
NetD31_2: D31.2 R34.2 | length 63.8
  Top Layer w15: D31.2 3877.56,1601.02 R34.2
NetD32_2: D32.2 R35.2 | length 73.8
  Top Layer w15: D32.2 3877.56,418.98 R35.2
P1_4: U32.18
P1_6: U32.20
P5.1: U32.6
PCKP: C17.2 C18.2 U3.12 | length 182.4
  Top Layer w25: C17.2 C18.2 3067.09,722.91 3096.93,693.07 3120,693.07
PJ_3: U32.26
PU.0: U32.38
PU.1: U32.40
REG: C16.1 Rz5.1 U3.10 | length 189.4
  Top Layer w11: C16.1 C16.1@3145,820 ; 3170,760 3170,795 ; U3.10 3170.16,759.84 ; Rz5.1@3197.44,795 Rz5.1
  Top Layer w20: C16.1 3157.56,800 Rz5.1
RST: R31.1 SBW.2 U32.48 | length 716.3
  Top Layer w10: v1(3500,585) 3566.73,651.73 U32.48
  Top Layer w15: R31.1 v1(3500,585)
  Signal 1 w15: v1(3500,585) 3545,540 3590,540 3760,370 3820,370 3890,300 SBW.2
RX: P35.5 T4.0 U1.1 U32.17 U32.34 | length 1562.6
  Top Layer w9: v1@3625,960 3651.1,933.9 U32.34
  Top Layer w10: U1.1 3539.41,115.59 3550,105 T4.0 ; U32.17 3930.47,730.47 P35.5
  Bottom Layer w10: T4.0 3550,100 3755,305 3755,685 ; v1@3625,960 3625,790 3730,685 3755,685 ; P35.5 3820,750 3755,685
  other v1: 3635,960
RX_ENABLE: C7.1 T3.0 U1.5 U32.5 | length 954.7
  Top Layer w10: T3.0 3460,50 3510,100 3510,215 3517.4,222.4 U1.5 3539.41,273.03 C7.1 ; 3690.47,559.53 U32.5
  Bottom Layer w10: T3.0 3460,50 3515,105 3515,130 3700,315 v1@3700,550
  other v1: 3700,545
RX_WAKEUP: P35.4 T6.0 U2.1 U32.16 | length 1302.8
  Top Layer w10: U32.16 3914.21,710.79 3925,700 P35.4
  Top Layer w15: v1(3635,330) 3661.81,330 U2.1
  Signal 1 w15: v1(3635,330) 3800,330 3850,280 T6.0
  Bottom Layer w10: T6.0 3855,55 3855,635 3920,700 P35.4
RX_WAKEUP_ENABLE: C8.1 T5.0 U2.5 U32.4 | length 876
  Top Layer w10: C8.1 3627.56,405 3634.96,412.4 3664.41,412.4 3664.41,559.41 3670.79,565.79 U32.4
  Bottom Layer w10: T5.0 3285,85 3285,165 3485,365 3610,365 3635,390 v1(3635,415)
SEL1: Rz4.1 U3.9 | length 62.1
  Top Layer w10: U3.9 3189.84,724.84 3202.44,737.44 Rz4.1
SPI_CLK: E1.4 P31.3 U32.32 U42.6 | length 1321.6
  Top Layer w9: E1.4 v1@3460,1012.2 ; v1(3460,1000) v1@3460,1012.2 ; U32.32 3690.47,974.53 3652.8,1012.2 v1@3460,1012.2
  Top Layer w10: v1(3805,1385) U42.6 3805,1300 3855,1250 P31.3
  Signal 1 w15: v1(3460,1000) 3425,1035 3425,1110 3565,1250 3720,1250 3805,1335 v1(3805,1385)
SPI_CS_EPD: E1.1 P31.5 U32.35 | length 1294.6
  Top Layer w9: E1.1 3596.86,953.14 3631.42,918.58 U32.35
  Signal 1 w15: v1(3460,945) 3445,945 3390,1000 3390,1140 3535,1285 3695,1285 3765,1355 3765,1410 3790,1435 3870,1435 3900,1405 3900,1375 3925,1350 P31.5
SPI_CS_MEM: P31.2 U32.29 U42.1 | length 543.2
  Top Layer w9: U32.29 3749.53,1035.47 3705,1080 U42.1 3705,1160 3745,1200 P31.2
SPI_MISO: E1.6 P31.1 U32.31 U42.2 | length 880.2
  Top Layer w9: E1.6@3362.83,1051.57 3451.57,1051.57 3460,1060 v1(3475,1060)
  Top Layer w10: v1(3690,1020) 3690,1010 3700,1010 3710.16,999.84 U32.31 ; v1@3755,1080 U42.2 3755,1160 3770,1175 3895,1175 3920,1150 P31.1
  Signal 1 w15: v1(3475,1060) 3525,1010 3690,1010 3750,1070 v1(3765,1070)
SPI_MOSI: E1.5 P31.4 U32.30 U42.5 | length 1220.3
  Top Layer w9: E1.5 3536.88,1031.88 v1(3555,1050) 3701.01,1050 3729.84,1021.17 U32.30
  Top Layer w10: v1(3855,1385) U42.5 3891.3,1300 P31.4
  Signal 1 w15: v1(3555,1050) 3535,1070 3535,1145 3595,1205 3740,1205 3855,1320 v1(3855,1385)
SW_1: P35.2 R37.1 S2.1 U32.14 | length 788.4
  Top Layer w10: R37.1 3822.44,274.49 S2.1 3883.07,256.93 3900,240 3900,195 v1(3910,185) ; U32.14 3878.58,671.42 3915,635 3915,615 3930,600 P35.2
  Bottom Layer w10: v1(3910,185) 3895,200 3895,585 3910,600 P35.2
SW_2: P35.6 R36.1 S1.1 U32.19 | length 1387.4
  Top Layer w10: R36.1 3822.44,1725.51 S1.1 3846.93,1750 3895,1750 3910,1765 v2(3910,1820) ; U32.19 3904.84,769.84 P35.6@3935,800
  Bottom Layer w10: v2(3910,1820) 3900,1810 3900,1135 3935,1100 3965,1100 3984,1081 3984,814 3970,800 P35.6
TEST: SBW.3 U32.47 | length 644.4
  Top Layer w10: v1(3525,660) 3536.42,671.42 U32.47
  Signal 1 w15: v1@3535,660 3580,660 3615,625 3615,575 3705,485 3790,485 3875,400 3875,385 3910,350 SBW.3
TX: Q1.3 Q1.4 Q2.3 Q2.4 T9.0 U32.36 | length 1543.6
  Top Layer w10: v2(3535,920) 3588.54,920 U32.36
  Top Layer w20: Q2.3 3309.37,359.37 v2(3310,360) 3346.77,360 Q2.4 ; Q1.3 Q1.4
  Signal 1 w15: v2@3314,360 3314,316 3420,210 v2(3420,199.37)
  Bottom Layer w15: T9.0 3150,245 3190,285 3280,285 3314,319 v2@3314,360 ; v2@3314,363 3314,394 3450,530 3450,875 3495,920 v2(3535,920)
VBATT: C20.1 R12.1 Rz6.1 Rz9.1 T11.0 U3.1 | length 1198.1
  Top Layer w10: Rz9.1 v1(3516,405)
  Top Layer w15: R12.1 v1(3330,770)
  Top Layer w20: Rz6.1 2994.65,527.56 C20.1
  Top Layer w25: C20.1 2997.09,530 T11.0 ; T11.0@3050,535 3091.93,576.93 3120,576.93
  Signal 1 w15: T11.0 3165,415 3506,415 v1(3516,405)
  Bottom Layer w15: T11.0 3050,567 3265,782 3318,782 v1(3330,770)
VBATT_DIV: R43.2 U41.3 | length 43.4
  Top Layer w10: U41.3 3572.56,497.13 R43.2
VBATT_GATE1: R42.2 U41.5 U41.6 | length 58.9
  Top Layer w10: R42.2 3482.24,450.31 U41.6 U41.5
VBATT_SENSE: R42.1 Rz9.2 U41.4 | length 171.1
  Top Layer w10: Rz9.2 R42.1 3422.44,479.44 3432.68,489.69 U41.4
VCL: C61.1 E1.9 | length 148.7
  Top Layer w8: E1.9@3392.83,1110.62 3393.09,1110.36 3505.45,1110.36 3513.19,1118.1 C61.1@3538.19,1118.1
VCOM: C72.2 E1.39 E1.40 R62.2 | length 349.6
  Top Layer w9: E1.39 3441.17,1701.17 3460.86,1720.86 ; E1.40 3460.86,1720.86 ; R62.2 3469.88,1822.56 C72.2 3470,1730 3460.86,1720.86
VCOM_DRIVER: E1.30 R62.1 | length 454.2
  Top Layer w9: E1.30 3287.6,1524.01 3245,1566.61 3245,1670 3342.44,1767.44 R62.1
VCORE: C32.1 U32.13 | length 53.8
  Top Layer w9: U32.13 3880,628.54 C32.1
VDD_EPD: C78.2 E1.31 E1.32 R70.2 U9.1 | length 350.7
  Top Layer w9: E1.31 3428.46,1543.69 3438.19,1553.42 3428.23,1563.38 E1.32 ; C78.2@3638.62,1555.12 3641.18,1552.56 C78.2 C78.2@3642.91,1548.86
  Top Layer w15: 3438.19,1553.42 R70.2@3585,1553.42 ; R70.2 C78.2@3641.18,1552.56
VDH: C75.2 E1.36 | length 361.2
  Top Layer w9: E1.36 3542.12,1642.12 3570,1670 C75.2
VDL: C76.2 E1.37 E1.38 | length 369.7
  Top Layer w9: E1.37 3440.31,1661.8 3460,1681.49 ; E1.38 3496.49,1681.49 3520,1705 C76.2
VGH: C73.2 E1.34 Q61.3 | length 392.2
  Top Layer w9: E1.34 3670.35,1602.75 Q61.3 3677.6,1645.16 C73.2
VGL: C74.2 D61.1 E1.35 | length 441.7
  Top Layer w9: E1.35 3594.87,1622.43 C74.2@3707.44,1735
  Top Layer w15: C74.2@3707.44,1735 3707.44,1785.63 D61.1@3714.41,1792.6
VHARVEST: C5.1 D1.4 D1.5 Rz8.1 T1.0 | length 560.2
  Top Layer w15: D1.5 D1.4 3367.4,237.4 3387.56,257.56 3425,257.56 ; Rz8.1 3425,257.56 ; C5.1 3482.44,265 v2(3475,257.56) 3425,257.56
  Bottom Layer w15: T1.0 3350,80 3480,210 v2@3480,257.56
VHARVEST_Z: C14.2 C19.1 L1.1 R10.1 Rz8.2 | length 331.3
  Top Layer w20: R10.1 C19.1 3277.6,445 L1.1 C14.2 3385.21,422.39 3385.21,368.79 3411.44,342.56 Rz8.2
VREG: C31.2 C36.2 C41.2 C79.2 R31.2 R36.2 R37.2 Rz5.2 SBW.4 T15.0 T17.0 U9.3 U32.7 U32.11 U32.28 U42.3 U42.7 U42.8 | length 5405.8
  Top Layer w9: C36.2 3800.31,590.31 3808.58,598.58
  Top Layer w10: v1@3729.84,591.84 U32.7 ; U32.28 3769.21,969.21 3780,980 3780,982.44 C31.2@3772.44,990 ; v1(3780,1025) 3805,1050 U42.3 ; 3808.58,598.58 U32.11 ; R37.2 3895,310 3910,325 3910,375 3935,400 SBW.4 ; R36.2 3887.56,1700 T17.0
  Top Layer w15: v1(3375,590) 3402.44,590 R31.2 ; v2@3699.02,1407.28 C79.2 ; v2(3701.46,1404.84) 3705,1401.3 U42.8 ; C31.2 v1@3777.44,1022.44
  Top Layer w20: Rz5.2 3290,800 3315,825 v3(3350,825) ; C41.2 3696.14,1327.44 U42.8 U42.7
  Signal 1 w15: v2(3701.46,1404.84) 3701.46,1488.54 3645,1545 3635,1545 3635,1580 3755,1700 T17.0
  Signal 1 w20: T15.0 3050,70 2975,145 2975,550 3030,605 3030,690 ; 3210,870 3110,870 3030,790 3030,690 ; v1@3369,584 3136,584 3030,690 ; v1(3720,582) 3720,720
  Signal 1 w35: 3770,720 3800,690 v1(3800,545) 3835,545 3950,430 SBW.4 ; v1(3780,1025) 3780,955 3841,894 3841,774 3787,720
  Signal 1 w50: 3255,825 3210,870 3155,925 3155,1285 3345,1475 3565,1475 3635,1545 ; 3260,825 v3(3350,825) ; v3@3365,825 3470,720 3720,720 3770,720
XIN: U32.8 X1.1 | length 163.4
  Top Layer w9: X1.1 3700.79,490 3749.53,538.74 U32.8
XOUT: U32.9 X1.2 | length 145.6
  Top Layer w9: U32.9 3769.21,520 X1.2@3799.21,490
XT2_IN: C34.2 U32.45 X2.3 | length 241.5
  Top Layer w10: X2.3 3526.54,813.46 3540,800 3540,730 3559.21,710.79 U32.45
  Top Layer w15: C34.2 3472.56,829.21 X2.3
XT2_OUT: C33.1 U32.46 X2.1 | length 221
  Top Layer w10: X2.1 3401.69,718.31 3428.9,691.1 U32.46
pads on no net: E1.0 E1.8 U32.39 U32.43

## Polygon pours and split planes (outlines as drawn)
VREG on Signal 1 "Vreg_Pour" (solid, remove dead copper, pour order 4): 2900,500 3900,500 3900,1200 3400,1200 3500,1300 3550,1350 3600,1350 3700,1350 3800,1450 3900,1450 3900,1800 3500,1800 3400,1800 3300,1700 3200,1600 3100,1500 3000,1400 2900,1300 2900,500
GND on GND Plane "GND_Plane" (solid, remove dead copper, pour order 3): 2650,0 2650,2000 4000,2000 4000,0 2650,0

## Keep-outs
Keep-Out Layer:
  the board outline again, w10

## Other copper
Top Layer:
  region net VBATT: 3130,564 3130,590 3105,590 3105,564
  region net PCKP: 3130,680.14 3130,706.14 3105,706.14 3105,680.14
  rectangle net VDD_EPD: 3633.46,1507.84 3653.46,1544.84
  rectangle net VREG: 3690.46,1460.84 3709.46,1494.84
  rectangle net GND: 3633.46,1458.84 3652.46,1492.84
Signal 1:
  rectangle net VREG: 3668.6,1400.84 3725.64,1449.34
  region net VREG: 3722,616 3722,556 3754,556 3754,616
  rectangle net VREG: 3690,580 3750,612
  rectangle net VREG: 3750,1008 3810,1040
  rectangle net VREG: 3339,582 3399,614
  rectangle net VREG: 3320,823 3380,855
  rectangle net VREG: 3770,543 3830,575
  rectangle net VREG: 3766,547 3826,579

## Silkscreen, mask and mechanical layers (free items; w line width, h text height)
Top Overlay:
  lines w10: 2645,0 2645,2000
Bottom Overlay:
  circle w5: c3100,390 r30
  circle w5: c2900,470 r30
  circle w5: c3050,530 r30
  circle w5: c3050,50 r50
  circle w5: c2950,50 r50
  circle w5: c3150,50 r50
  circle w5: c3250,50 r50
  circle w5: c3350,50 r50
  circle w5: c3450,50 r50
  circle w5: c3550,50 r50
  circle w5: c3650,50 r50
  circle w5: c3750,50 r50
  circle w5: c3850,50 r50
  circle w5: c3950,1600 r50
  circle w5: c3950,1700 r50
  lines w3.94: 2890,300 2945,300 3035,390 3070,390
  lines w5: 2815,445 2840,470 2870,470 ; 2945,565 2985,565 3020,530 ; 3815,665 3875,605 3875,525 3925,475 3925,450 ; 3915,460 3925,450 ; 3935,460 3925,450
  lines w7.87: 3914.13,215 3914.13,435.87 3985,435.87 3985,215 3914.13,215
  lines w10: 2550.63,1758.39 2629.37,1758.39 ; 2590,1719.02 2590,1797.76 ; 2645,0 2645,2000 ; 2680,842.24 2680,920.98 ; 2700,1050 2705,1050 2930,825 2700,825 2700,1055 ; 2700,1595 2700,1825 2930,1825 2700,1595
  lines w40: 400,1300 2200,1300
  text "VREG" at 3935,1770 h30 r270
  text "GND" at 3935,1450 h30 r270
  text "NFC-WISP_EPD_0.2" at 2100,1400 h100
  text "UMASS Amherst" at 1400,1100 h60
  text "Jeremy Gummeson" at 2400,1100 h60
  text "University of Washington" at 1400,975 h60
  text "Artem Dementyev" at 2400,975 h60
  text "University of Washington" at 1400,850 h60
  text "Aaron Parks" at 2400,850 h60
  text "Intel Labs" at 1400,725 h60
  text "Alanson Sample" at 2400,725 h60
  text "GND" at 3800,650 h30
  text "RST" at 3800,600 h30
  text "VBATT" at 2925,555 h30
  text "TEST" at 3800,550 h30
  text "VREG" at 3800,500 h30
  text "B1" at 2825,400 h30
  text "Copyright Intel Corporation 2013" at 1500,300 h40
  text "CHG" at 2875,290 h30
  text "APS - 5/28/2013" at 1500,200 h40
  text "GND" at 2940,130 h30 r270
  text "VREG" at 3040,130 h30 r270
  text "TX" at 3140,130 h30 r270
  text "RX_WakeUp_Enable" at 3240,130 h30 r270
  text "VHarvest" at 3340,130 h30 r270
  text "RX_Enable" at 3440,130 h30 r270
  text "RX" at 3540,130 h30 r270
  text "Bitline" at 3640,130 h30 r270
  text "Bitline_LPF" at 3740,130 h30 r270
  text "RX_Wakeup" at 3840,130 h30 r270
Mechanical 1:
  circle w5: c3150,50 r50
  circle w5: c3050,50 r50
  circle w5: c2950,50 r50
  circle w5: c3450,50 r50
  circle w5: c3350,50 r50
  circle w5: c3250,50 r50
  circle w5: c3750,50 r50
  circle w5: c3650,50 r50
  circle w5: c3550,50 r50
  circle w5: c3950,1700 r50
  circle w5: c3950,1600 r50
  circle w5: c3850,50 r50
  rectangle: 700,1900 800,2000
  region: 800,0 800,100 700,100 700,0
  region: 100,227 100,327 0,327 0,227
  lines w7.87: 3914.13,515 3914.13,1085 3985,1085 3985,515 3914.13,515 ; 3914.13,1115 3914.13,1435 3985,1435 3985,1115 3914.13,1115 ; 3915,215 3985.87,215 3985.87,435.87 3915,435.87 3915,215
  text "VREG" at 4025,1675 h30
  text "GND" at 4025,1575 h30
  text "GND" at 4025,1375 h30
  text "P4.6 / SPI_SC_EPD" at 4025,1325 h30
  text "P4.5 / SPI_MISO" at 4025,1275 h30
  text "P4.3 / SPI_CLK" at 4025,1225 h30
  text "P4.0 / SPI_CS_Mem" at 4025,1175 h30
  text "P4.2 / SPI_MOSI" at 4025,1125 h30
  text "PJ.2 / EPD_RESET" at 4025,1025 h30
  text "PJ.1 / EPD_Panel_On" at 4025,975 h30
  text "PJ.0 / EPD_Discharge" at 4025,925 h30
  text "P2.0 / EPD_PWM" at 4025,875 h30
  text "P1.7 / LED2" at 4025,825 h30
  text "P1.5 / SW2" at 4025,775 h30
  text "P1.3 / RX" at 4025,725 h30
  text "P1.2 / RX_WakeUp" at 4025,675 h30
  text "P1.1 / LED1" at 4025,625 h30
  text "P1.0 / SW1" at 4025,575 h30
  text "GND" at 4025,525 h30
  text "VREG" at 4020,380 h30
  text "TEST" at 4020,330 h30
  text "RST" at 4020,280 h30
  text "GND" at 4020,230 h30
  text "GND" at 2935,-25 h30 r270
  text "VReg" at 3035,-25 h30 r270
  text "TX" at 3135,-25 h30 r270
  text "RX_WakeUp_Enable" at 3235,-25 h30 r270
  text "VHarvest" at 3335,-25 h30 r270
  text "RX_Enable" at 3435,-25 h30 r270
  text "RX" at 3535,-25 h30 r270
  text "Bitline" at 3635,-25 h30 r270
  text "Bitline_LPF" at 3735,-25 h30 r270
  text "RX_Wakeup" at 3835,-25 h30 r270
Mechanical 2:
  circle w10: c0,0 r50
  circle w10: c0,0 r50
  circle w5: c3290,1337 r30
  lines w3.94: 3820,190 3840,190 ; 3820,1810 3840,1810 ; 3840,170 3840,190 ; 3840,210 3840,190 ; 3840,450 3860,450 ; 3840,1550 3860,1550 ; 3840,1790 3840,1810 ; 3840,1830 3840,1810 ; 3860,190 3840,190 ; 3860,430 3860,450 ; 3860,470 3860,450 ; 3860,1530 3860,1550 ; 3860,1570 3860,1550 ; 3860,1810 3840,1810 ; 3880,450 3860,450 ; 3880,1550 3860,1550
  lines w5: 3240,1337 3290,1337 ; 3290,1287 3290,1337 ; 3290,1387 3290,1337 ; 3340,1337 3290,1337
  lines w10: 0,0 100,0 -100,0 0,0 ; 0,0 0,100 0,0 ; 0,0 0,-100 0,0
Mechanical 3:
  rectangle: 0,0 4000,100
  rectangle: 0,0 100,2000
  rectangle: 2885,1850 2985,2000
  rectangle: 2885,95 2985,145
  rectangle: 3900,0 4000,2000
  rectangle: 0,1900 4000,2000
  region: 2985,150 2885,150 2885,0 2985,0
  lines w10: 0,0 1125,1125 ; 0,125 125,0 ; 0,1875 125,2000 ; 0,2000 1125,875 ; 25,150 150,25 ; 25,1850 150,1975 ; 50,175 175,50 ; 50,1825 175,1950 ; 75,200 200,75 ; 75,1800 200,1925 ; 100,225 225,100 ; 100,1775 225,1900 ; 125,250 250,125 ; 125,1750 250,1875 ; 150,275 275,150 ; 150,1725 275,1850 ; 175,300 300,175 ; 175,1700 300,1825 ; 200,325 325,200 ; 200,1675 325,1800 ; 225,350 350,225 ; 225,1650 350,1775 ; 250,375 375,250 ; 250,1625 375,1750 ; 275,400 400,275 ; 275,1600 400,1725 ; 300,425 425,300 ; 300,1575 425,1700 ; 325,450 450,325 ; 325,1550 450,1675 ; 350,475 475,350 ; 350,1525 475,1650 ; 375,500 500,375 ; 375,1500 500,1625 ; 1525,1125 2650,0 ; 1532.48,875 2657.48,2000 2657.48,0 ; 2150,375 2275,500 ; 2157.48,1625 2282.48,1500 ; 2175,350 2300,475 ; 2182.48,1650 2307.48,1525 ; 2200,325 2325,450 ; 2207.48,1675 2332.48,1550 ; 2225,300 2350,425 ; 2232.48,1700 2357.48,1575 ; 2250,275 2375,400 ; 2257.48,1725 2382.48,1600 ; 2275,250 2400,375 ; 2282.48,1750 2407.48,1625 ; 2300,225 2425,350 ; 2307.48,1775 2432.48,1650 ; 2325,200 2450,325 ; 2332.48,1800 2457.48,1675 ; 2350,175 2475,300 ; 2357.48,1825 2482.48,1700 ; 2375,150 2500,275 ; 2382.48,1850 2507.48,1725 ; 2400,125 2525,250 ; 2407.48,1875 2532.48,1750 ; 2425,100 2550,225 ; 2432.48,1900 2557.48,1775 ; 2450,75 2575,200 ; 2457.48,1925 2582.48,1800 ; 2475,50 2600,175 ; 2482.48,1950 2607.48,1825 ; 2500,25 2625,150 ; 2507.48,1975 2632.48,1850 ; 2525,0 2650,125 ; 2532.48,2000 2657.48,1875

## Text inside footprints (layer, text, board x,y; h text height)
B1: Bottom Overlay "Caution:" at 3250,1750 h60 r90; Bottom Overlay "Bottom of MEC is conductive" at 3300,1750 h30 r90; Bottom Overlay "(positive terminal). Use double" at 3350,1750 h30 r90; Bottom Overlay "sided Kapton to insulate and" at 3400,1750 h30 r90; Bottom Overlay "affix cell to board." at 3450,1750 h30 r90
U9: Top Overlay "o" at 3630.12,1523.46 h3.94 r270
U42: Mechanical 3 "routing in this area." at 3709.13,1237.87 h5; Mechanical 3 "minimize traces" at 3709.13,1249.69 h5; Mechanical 3 "Exposed floating pad:" at 3709.13,1261.5 h5